# Altium PCB sensor.PcbDoc
Units mil, origin at the board's own origin, x right, y up, seen from the top; angles counter-clockwise.
Board outline 3160 x 3160 mil, 2 copper layers (Top Layer, Bottom Layer); 72 components, 30 nets, 168 pads, 13 vias.
Unrouted connection lines stored in the file: 11.
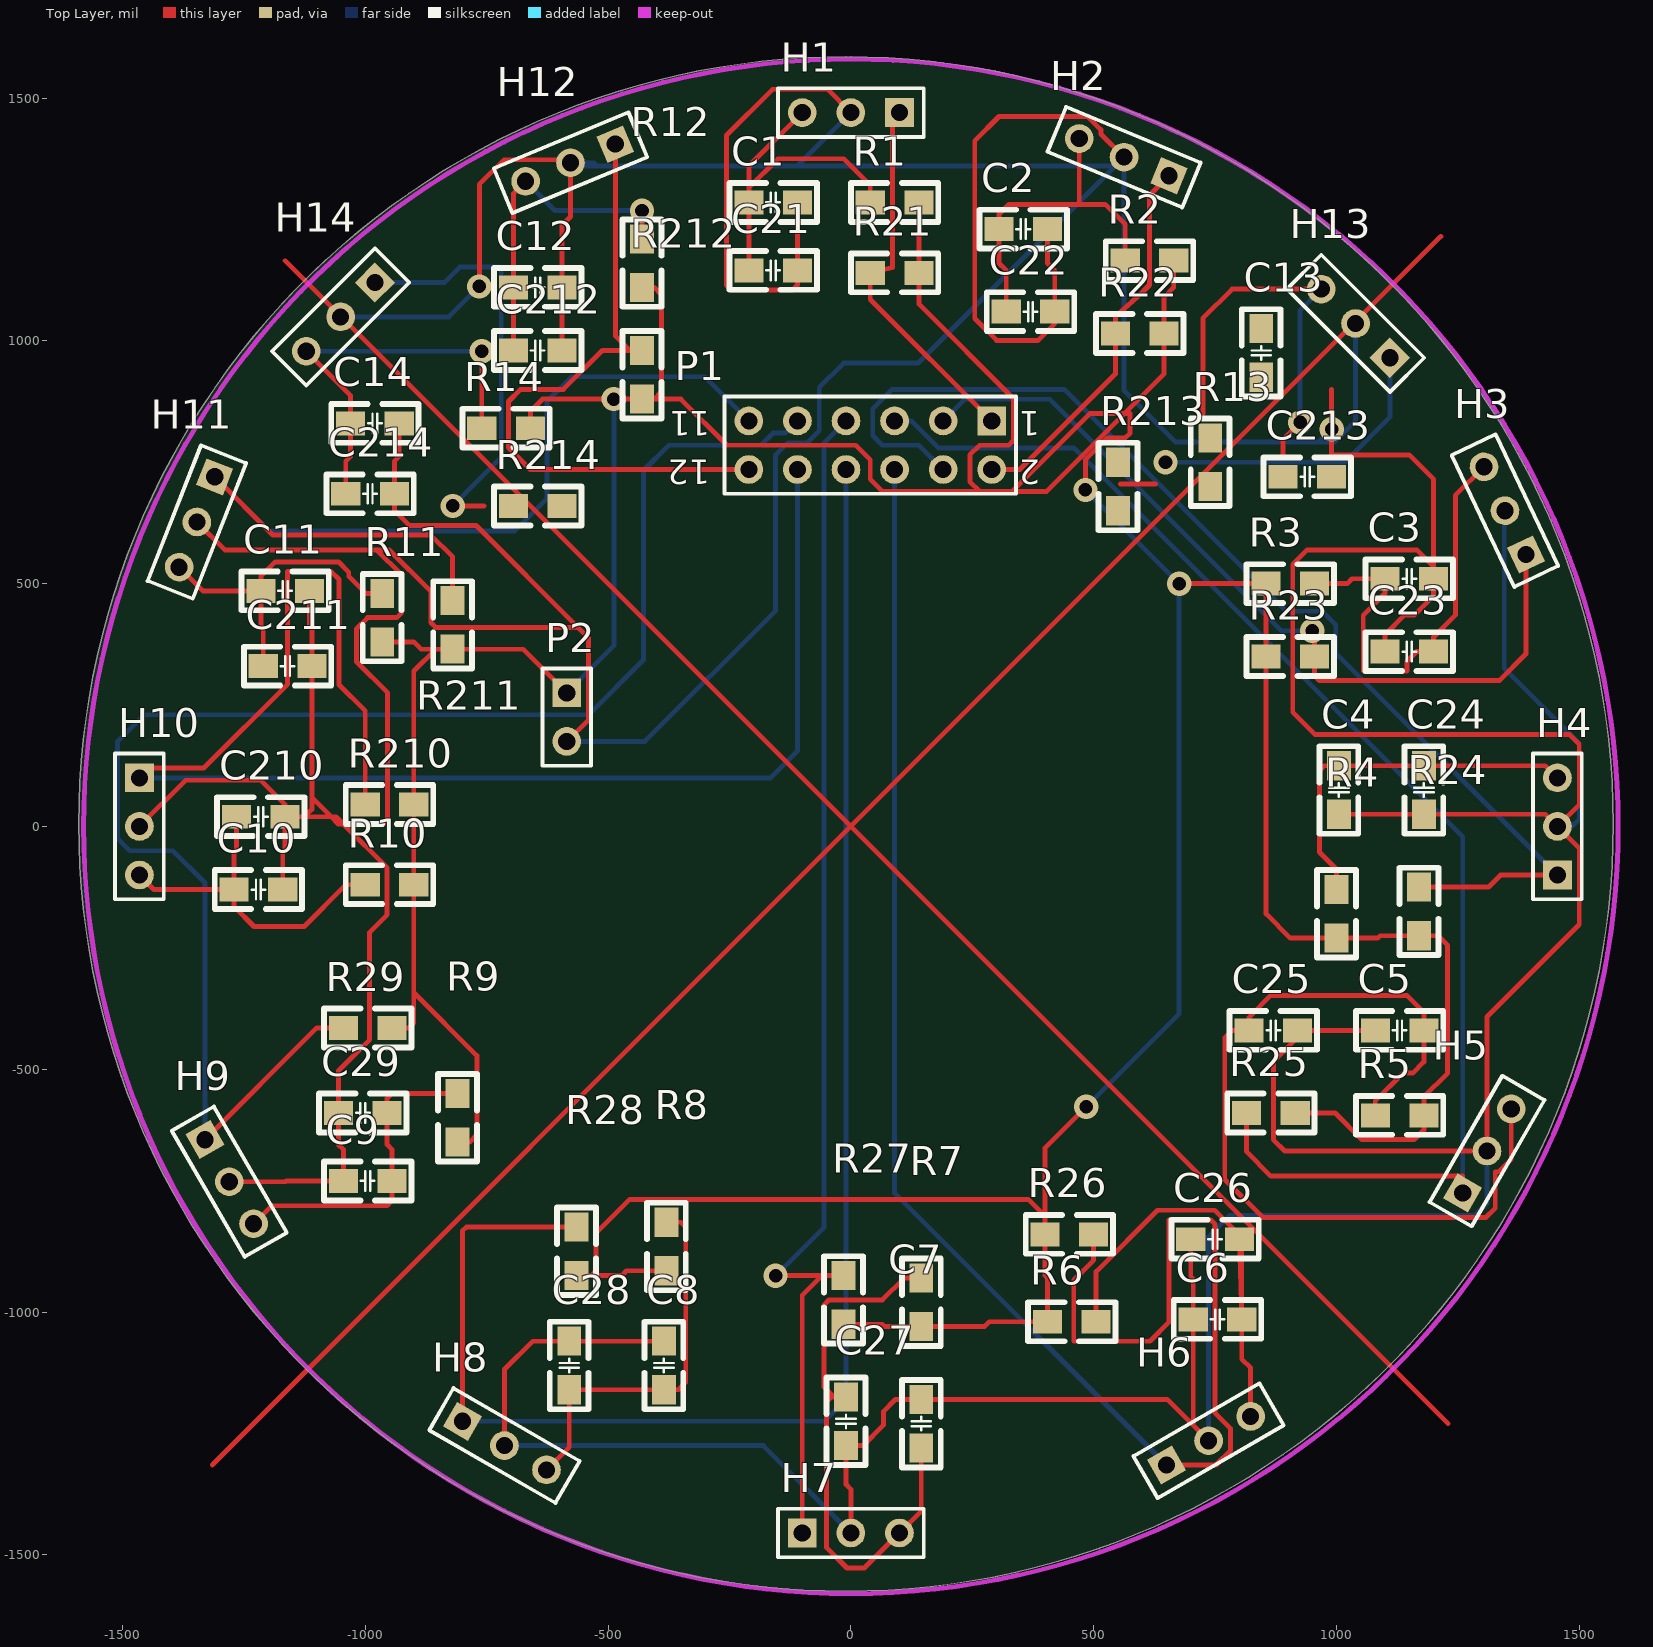
[diagram p0: Top Layer view]
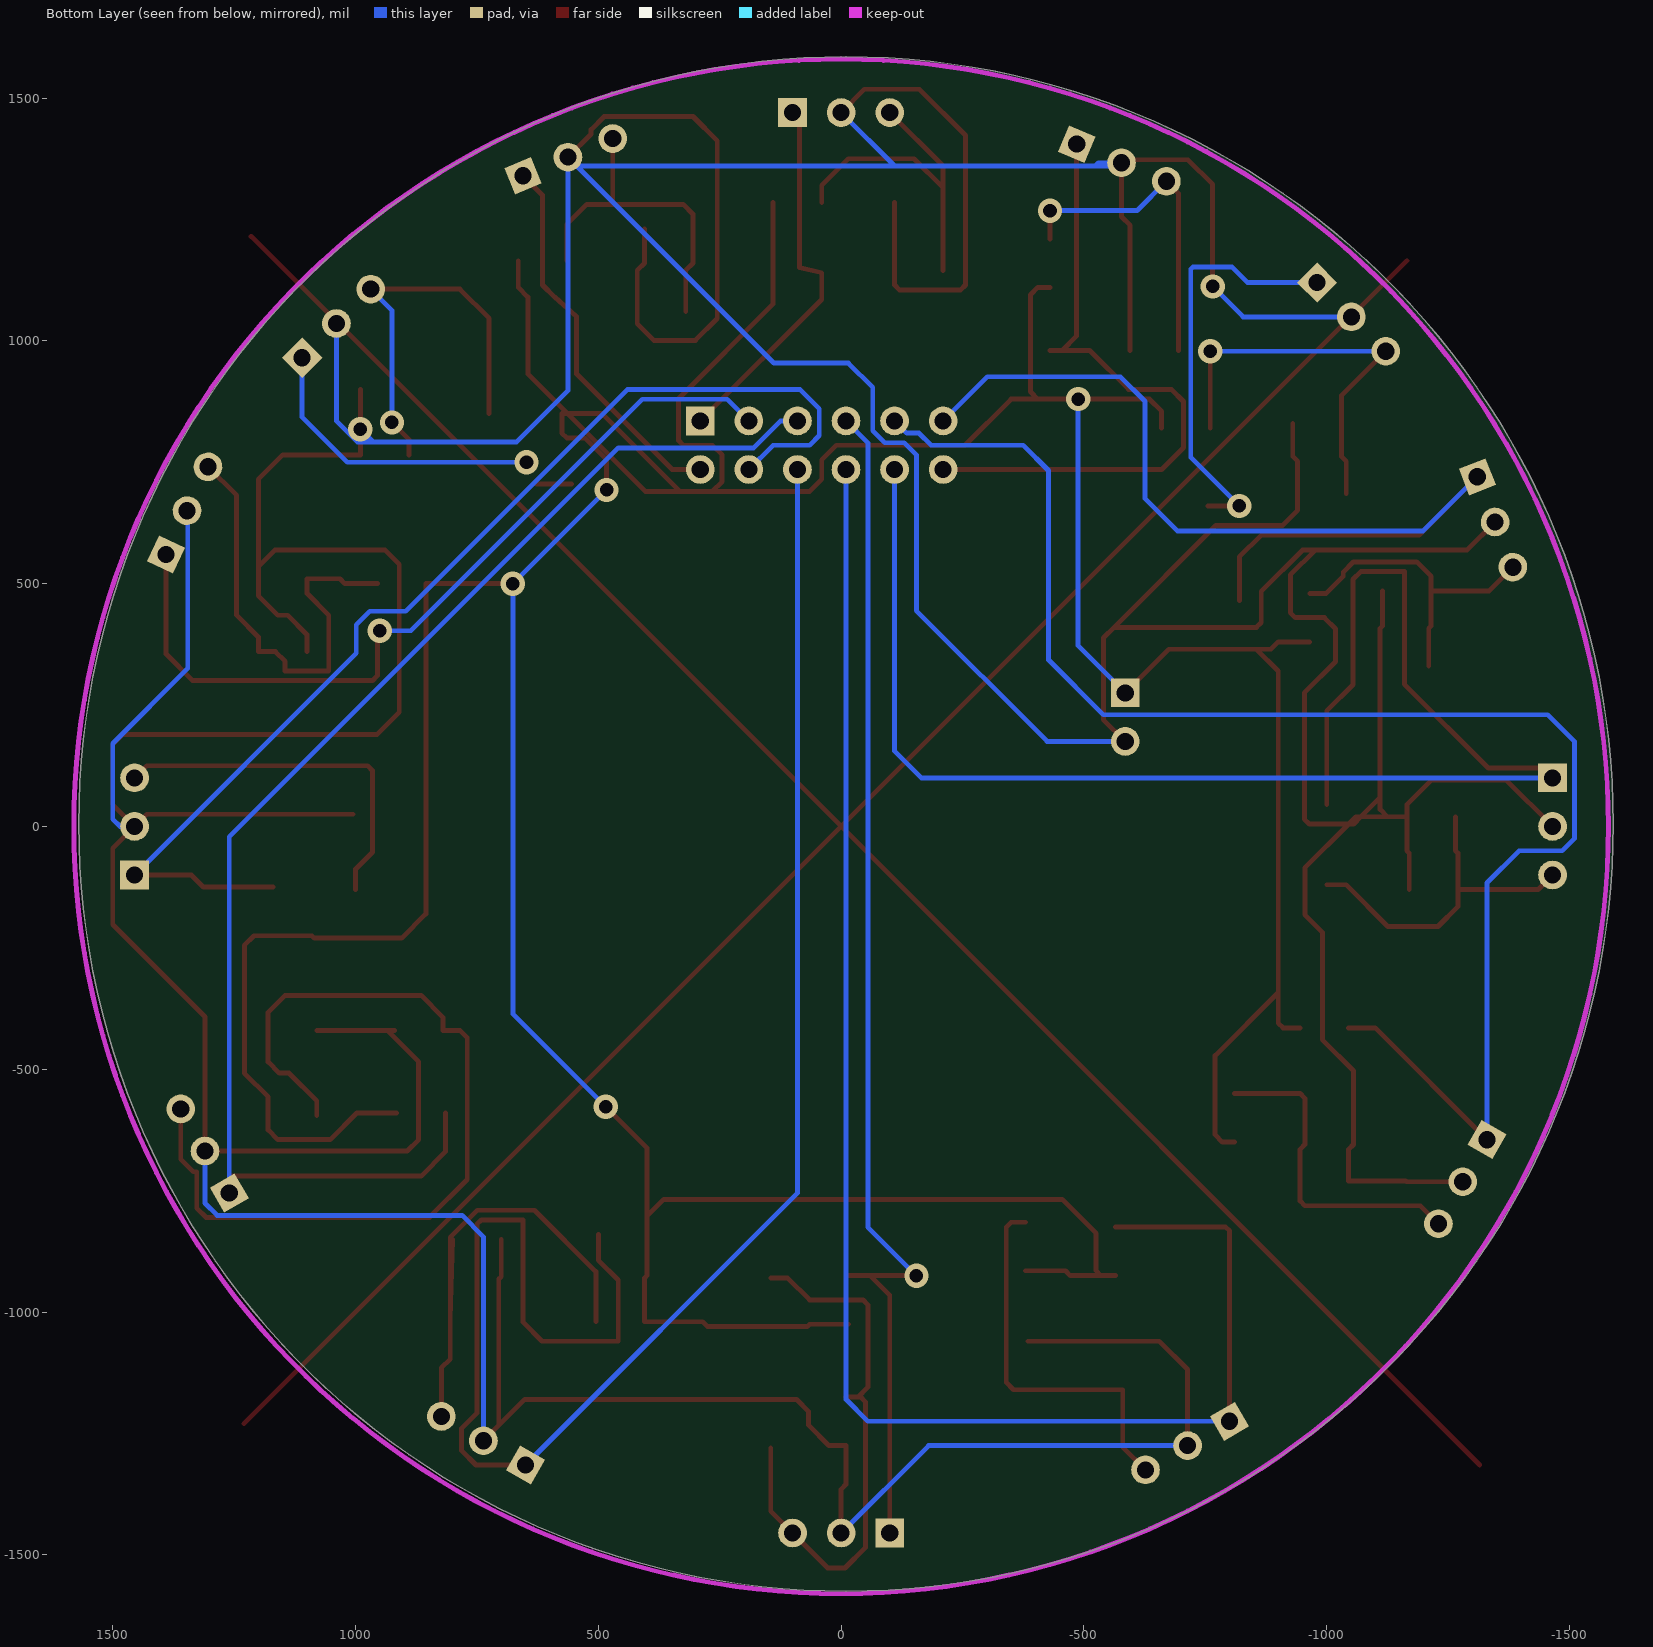
[diagram p1: Bottom Layer view, seen from below]

## Layer stack, top to bottom
Top Layer: signal copper 1.4
Dielectric: core 12.6, FR-4, Dk 4.8
Bottom Layer: signal copper 1.4

## Board outline
-1590,5 ccw(c-10,5) -10,-1575 ccw(c-10,5) 1570,5 ccw(c-10,5) -10,1585 ccw(c-10,5)

## Design rules (kind name [scope] priority, off if disabled: settings)
Clearance [All] p1: gap=10
PolygonConnect [All] p1: connectstyle=Relief reliefconductorwidth=10 reliefentries=4 polygonreliefangle="90 Angle" airgapwidth=10
RoomDefinition 2016 [InComponentClass('2016')] p1: confinementstyle=ConfineIn formatcopy=TRUE lockcomponents=FALSE outline 1395,505 16815,505 16815,1390 1395,1390
RoutingVias [All] p1: holewidth=28 width=50 viastyle="Through Hole" minholewidth=28 minwidth=50 maxholewidth=28 maxwidth=50
SolderMaskExpansion [All] p1: expansion=4
Width [All] p1: maxlimit=10 minlimit=10 preferedwidth=10
28 further rules are at their usual default settings.

## Components (designator, comment, footprint, x,y, rotation, side; value= is the part's Value field where it differs from the comment)
C1 "Cap" 0805C -110,1285 r0 top
C2 "Cap" 0805C 405,1230 r0 top
C3 "Cap" 0805C 1200,510 r0 top
C4 "Cap" 0805C 1005,25 r270 top
C5 "Cap" 0805C 1080,-420 r180 top
C6 "Cap" 0805C 705,-1015 r180 top
C7 "Cap" 0805C 145,-1180 r90 top
C8 "Cap" 0805C -385,-1060 r90 top
C9 "Cap" 0805C -1045,-730 r180 top
C10 "Cap" 0805C -1170,-130 r0 top
C11 "Cap" 0805C -1115,485 r0 top
C12 "Cap" 0805C -595,1110 r0 top
C13 "Cap" 0805C 845,1025 r90 top
C14 "Cap" 0805C -930,830 r0 top
C21 "Cap Pol3" 0805C -210,1145 r180 top
C22 "Cap Pol3" 0805C 320,1060 r180 top
C23 "Cap Pol3" 0805C 1200,360 r0 top
C24 "Cap Pol3" 0805C 1180,125 r90 top
C25 "Cap Pol3" 0805C 820,-420 r180 top
C26 "Cap Pol3" 0805C 800,-850 r0 top
C27 "Cap Pol3" 0805C -10,-1175 r90 top
C28 "Cap Pol3" 0805C -580,-1160 r270 top
C29 "Cap Pol3" 0805C -955,-590 r0 top
C210 "Cap Pol3" 0805C -1265,20 r180 top
C211 "Cap Pol3" 0805C -1210,330 r180 top
C212 "Cap Pol3" 0805C -695,980 r180 top
C213 "Cap Pol3" 0805C 890,720 r180 top
C214 "Cap Pol3" 0805C -1040,685 r180 top
H1 "Header 3" HDR1X3 100,1470 r180 top
H2 "Header 3" HDR1X3 655,1340 r157.5 top
H3 "Header 3" HDR1X3 1390,560 r115.5 top
H4 "Header 3" HDR1X3 1455,-100 r90 top
H5 "Header 3" HDR1X3 1260,-755 r60 top
H6 "Header 3" HDR1X3 650,-1315 r30 top
H7 "Header 3" HDR1X3 -100,-1455 r0 top
H8 "Header 3" HDR1X3 -800,-1225 r330 top
H9 "Header 3" HDR1X3 -1330,-645 r300 top
H10 "Header 3" HDR1X3 -1465,100 r270 top
H11 "Header 3" HDR1X3 -1310,720 r248.5 top
H12 "Header 3" HDR1X3 -485,1405 r202.5 top
H13 "Header 3" HDR1X3 1110,965 r135 top
H14 "Header 3" HDR1X3 -980,1120 r225 top
P1 "Header 6X2" HDR2X6 290,835 r180 top
P2 "Header 2" HDR1X2 -585,275 r270 top
R1 "Res1" 0805R 40,1285 r180 top
R2 "Res1" 0805R 565,1165 r180 top
R3 "Res1" 0805R 955,500 r0 top
R4 "Res1" 0805R 1000,-130 r90 top
R5 "Res1" 0805R 1080,-595 r180 top
R6 "Res1" 0805R 505,-1020 r0 top
R7 "Res1" 0805R 145,-930 r90 top
R8 "Res1" 0805R -380,-815 r90 top
R9 "Res1" 0805R -810,-550 r90 top
R10 "Res1" 0805R -1000,-120 r180 top
R11 "Res1" 0805R -965,480 r90 top
R12 "Res1" 0805R -430,1210 r90 top
R13 "Res1" 0805R 740,700 r270 top
R14 "Res1" 0805R -760,820 r180 top
R21 "Res1" 0805R 40,1140 r180 top
R22 "Res1" 0805R 545,1015 r180 top
R23 "Res1" 0805R 955,350 r0 top
R24 "Res1" 0805R 1170,-125 r90 top
R25 "Res1" 0805R 815,-590 r180 top
R26 "Res1" 0805R 500,-840 r0 top
R27 "Res1" 0805R -15,-925 r90 top
R28 "Res1" 0805R -565,-825 r90 top
R29 "Res1" 0805R -1045,-415 r180 top
R210 "Res1" 0805R -1000,45 r180 top
R211 "Res1" 0805R -820,465 r90 top
R212 "Res1" 0805R -430,980 r90 top
R213 "Res1" 0805R 550,650 r270 top
R214 "Res1" 0805R -695,660 r180 top

## Footprints (in the part's own frame and the unit in brackets; to place one, negate y for a bottom-side part, rotate by r counter-clockwise, add the part's x,y. Pads: shape width x height; smd on the part's side, far side on the other; paste and mask are expansions set on the pad)
0805C [mil]
  rect 60x49.21 smd: 1(0,0) 2(-100,0)
  silkscreen extent -140,-40 40,40, body extent -95,-25 -15,24, height 36
0805R [mil]
  rect 60x49.21 smd: 1(0,0) 2(-100,0)
  silkscreen extent -140,-40 40,40
HDR1X2 [mm] "Connector; Header; 2 Position"
  rect 1.5x1.5 hole 0.9: 1(0,0)
  round 1.5 hole 0.9: 2(2.54,0)
  silkscreen extent -1.27,-1.27 3.81,1.27
HDR1X3 [mm] "Connector; Header; 3 Position"
  rect 1.5x1.5 hole 0.9: 1(0,0)
  round 1.5 hole 0.9: 2(2.54,0) 3(5.08,0)
  silkscreen extent -1.27,-1.27 6.35,1.27
HDR2X6 [mm] "Connector; Header; 6x2 Position"
  rect 1.5x1.5 hole 0.9: 1(0,0)
  round 1.5 hole 0.9: 2(0,2.54) 3(2.54,0) 4(2.54,2.54) 5(5.08,0) 6(5.08,2.54) 7(7.62,0) 8(7.62,2.54) 9(10.16,0) 10(10.16,2.54) 11(12.7,0) 12(12.7,2.54)
  silkscreen extent -1.27,-1.27 13.97,3.81

## Part data
C1 C2 C3 C4 C5 C6 C7 C8 C9 C10 C11 C12 C13 C14: "Capacitor"
C21 C22 C23 C24 C25 C26 C27 C28 C29 C210 C211 C212 C213 C214: "Polarized Capacitor (Surface Mount)"
H1 H2 H3 H4 H5 H6 H7 H8 H9 H10 H11 H12 H13 H14: "Header, 3-Pin"
P1: "Header, 6-Pin, Dual row"
P2: "Header, 2-Pin"
R1 R2 R3 R4 R5 R6 R7 R8 R9 R10 R11 R12 R13 R14 R21 R22 R23 R24 R25 R26 R27 R28 R29 R210 R211 R212 R213 R214: "Resistor"

## Via types
v1: diameter 50, hole 28, Top Layer to Bottom Layer, 13 vias

## Nets (pads, with @x,y where several pads share a name; then routed paths per layer and width w, separated by ;. In a path a pad name is that pad's centre, name@x,y a point inside that pad or via, vN(x,y) a via of type N, cw(c..) or ccw(c..) an arc to the next point about the centre after c; other vN are vias at no path point)
+5: P2.1 R1.2 R2.2 R3.2 R4.2 R5.2 R6.2 R7.2 R8.2 R9.2 R10.2 R11.2 R12.2 R13.2 R14.2 R21.2 R22.2 R23.2 R24.2 R25.2 R26.2 R27.2 R28.2 R29.2 R210.2 R211.2 R212.2 R213.2 R214.2 | length 11196.7
  Top Layer w10: R11.2 -900,380 -885,365 -855,365 ; R29.2 -910,-415 -900,-405 -900,-342 ; R9.2 -785,-650 -770,-635 -770,-472 -900,-342 ; R14.2 -660,855 -635,880 v1(-488,880) R212.2 -405,880 ; P2.1 -675,365 R211.2 -855,365 ; R28.2 -535,-925 ; R12.2 -405,1110 -390,1095 -390,895 -405,880 ; R8.2 -462,-915 -472,-925 -535,-925 ; R27.2 65,-1025 70,-1030 R7.2 275,-1030 285,-1020 R6.2 405,-930 400,-925 R26.2 400,-803 ; R1.2 R21.2 140,1076 335,881 335,795 325,785 265,785 245,765 245,710 265,690 ; v1(483,693) 483,755 528,800 565,800 575,810 575,850 ; v1(485,-577) 400,-662 400,-803 ; R2.2 665,1110 645,1090 R22.2 645,932 569,856 ; v1(676,500) R3.2 R23.2 855,-180 905,-230 R4.2 1085,-230 1090,-225 R24.2 1209,-225 1229,-245 1229,-508 1180,-557 R5.2 1180,-625 1160,-645 1052,-645 997,-590 R25.2 ; -900,-342 R10.2 R210.2 -900,320 -855,365 ; -535,-925 -525,-915 -525,-838 -455,-768 365,-768 400,-803 ; -405,880 -350,880 -255,785 10,785 40,755 40,715 65,690 265,690 ; 265,690 332,690 ; 332,690 403,690 563,850 ; 332,690 492,850 563,850 ; 563,850 569,856 ; 563,850 575,850 ; 569,856 575,850
  Bottom Layer w10: P2.1 -488,372 v1(-488,880) ; v1(483,693) v1(676,500) 676,-386 v1(485,-577)
GND: C1.1 C2.1 C3.1 C4.1 C5.1 C6.1 C7.1 C8.1 C9.1 C10.1 C11.1 C12.1 C13.1 C14.1 C21.2 C22.2 C23.2 C24.2 C25.2 C26.2 C27.2 C28.2 C29.2 C210.2 C211.2 C212.2 C213.2 C214.2 H1.2 H2.2 H3.2 H4.2 H5.2 H6.2 H7.2 H8.2 H9.2 H10.2 H11.2 H12.2 H13.2 H14.2 P2.2 | length 21444.5
  Top Layer w10: H10.2 -1370,95 -1215,95 -1165,45 C210.2 ; H11.2 -1288.69,569 -976,569 ; H9.2 -1164,-731.6 -1162.4,-730 C9.1 -1045,-665 -1055,-655 C29.2 -1055,-503 -991,-439 -991,-218 -955,-182 -955,-85 -1045,5 ; C10.1 -1170,-55 -1165,-50 C210.2 ; C11.1 -1115,413 -1110,408 C211.2 -1110,60 ; C14.1 -930,762 -940,752 C214.2 -940,651 -909,620 -772,620 -562,410 ; v1(-765,1112) -765,1322 -714,1373 -583.66,1373 H12.2 -577.39,1255.61 -595,1238 C12.1 C212.2 ; H8.2 -713.4,-1118.4 -655,-1060 C28.2 C8.1 ; P2.2 -540,220 -540,388 -562,410 ; C1.1 C21.2 -110,1115 -120,1105 -246,1105 -256,1115 -256,1423 -161,1518 -48,1518 H1.2 ; H7.2 0,-1365 -10,-1355 C27.2 25,-1275 67,-1233 67,-1205 92,-1180 C7.1 651.6,-1180 705,-1233.4 ; C2.1 405,1160 420,1145 C22.2 420,1035 386,1001 300,1001 255,1046 255,1412 305,1462 488,1462 515,1435 515,1425.88 H2.2 ; C26.2 700,-927 705,-932 C6.1 705,-1233.4 ; H6.2 705,-1233.4 ; C25.2 C25.2@935,-420 ; 990,900 v1(990,818) 990,765 1150,765 1200,715 1200,535 ; C4.1 C24.2 1430,25 H4.2 ; C5.1 1000,-420 C25.2@935,-420 ; C23.2 1100,395 1140,435 1160,435 1200,475 C3.1 1200,535 ; C210.2 -1125,20 ; -1125,20 -1070,20 ; -1125,20 -1110,35 -1110,60 ; -1110,60 -1070,20 ; -1070,20 -1055,5 -1045,5 ; -1070,20 -1060,20 -1045,5 ; -1045,5 -964,5 -954,15 -954,275 -1018,339 -1018,407 -995,430 -935,430 -925,440 -925,518 -976,569 ; -976,569 -950,569 -865,484 -865,420 -855,410 -562,410 ; C25.2@935,-420 870,-485 870,-645 893.4,-668.4 H5.2 1310,-392 1500,-202 1500,-45 H4.2 ; 1200,535 1166,569 939,569 910,540 910,235 956,189 1480,189 1500,169 1500,45 H4.2
  Bottom Layer w10: H14.2 -827.71,1049.29 v1(-765,1112) ; H8.2 -180,-1275 H7.2 ; P2.2 -424,175 -155,444 -155,765 -130,790 -90,790 -65,815 -65,904 -15,954 138.34,954 H2.2@544.34,1360 ; H1.2 -110,1360 ; H6.2 736.6,-845 780.6,-801 1285,-801 1310,-776 H5.2 ; v1(990,818) 964,792 ; H13.2 1039.29,835 996.29,792 964,792 ; H3.2 1345.46,648.77 1345.46,325.33 1500,170.79 1500,15 1485,0 H4.2 ; -523,1360 -570.66,1360 H12.2 -529.73,1366.73 -523,1360 ; -523,1360 -110,1360 ; -110,1360 H2.2@544.34,1360 ; H2.2@544.34,1360 H2.2 562.61,897.39 668,792 964,792
NetC1_2: C1.2 C21.1 H1.3 R1.1 | length 703.2
  Top Layer w10: C21.1 C1.2 -210,1315 ; H1.3 -210,1360 -210,1315 ; R1.1 40,1320 -15,1375 -150,1375 -210,1315
NetC2_2: C2.2 C22.1 H2.3 R2.1 | length 703
  Top Layer w10: C22.1 320,1145 305,1160 C2.2 305,1261 325,1281 470.22,1281 ; H2.3 470.22,1281 ; R2.1 565,1240 524,1281 470.22,1281
NetC3_2: C3.2 C23.1 H3.3 R3.1 | length 953.8
  Top Layer w10: R3.1 1022,500 1032,510 C3.2 1100,480 1055,435 1055,320.39 1145,320.39 1145,340 1165,360 C23.1 1200,390 1245,435 1245,681.62 H3.3
NetC4_2: C4.2 C24.1 H4.3 R4.1 | length 764
  Top Layer w10: R4.1 1000,-88 965,-53 965,115 975,125 C4.2 C24.1 1430,125 H4.3
NetC5_2: C5.2 C25.1 H5.3 R5.1 | length 1852.6
  Top Layer w10: R5.1 1080,-565 1137,-508 1157,-508 1180,-485 C5.2 1180,-383 1145,-348 865,-348 820,-393 C25.1 785,-420 770,-435 770,-727 848,-805 1308,-805 1327,-786 1327,-711 1334,-711 1360,-685 H5.3
NetC6_2: C6.2 C26.1 H6.3 R6.1 | length 1020.2
  Top Layer w10: R6.1 505,-916.83 631.44,-790.39 749.39,-790.39 805,-846 C6.2 ; C26.1 C6.2 ; H6.3 823.21,-1115 805,-1096.79 C6.2
NetC7_2: C7.2 C27.1 H7.3 R7.1 | length 1156.1
  Top Layer w10: C27.1 -35,-1175 ; C7.2 145,-1410 H7.3 28,-1527 -8,-1527 -50,-1485 -50,-1185 -40,-1175 -35,-1175 ; R7.1 110,-930 65,-975 -45,-975 -55,-985 -55,-1155 -35,-1175
NetC8_2: C8.2 C28.1 H8.3 R8.1 | length 794.7
  Top Layer w10: H8.3 -580,-1278.21 C28.1 C8.2 -355,-1160 -340,-1145 -340,-825 -350,-815 R8.1
NetC9_2: C9.2 C29.1 H9.3 R9.1 | length 668.8
  Top Layer w10: H9.3 -1192.79,-781 -955,-781 -945,-771 C9.2 -945,-665 -955,-655 C29.1 -955,-560 -945,-550 R9.1
NetC10_2: C10.2 C210.1 H10.3 R10.1 | length 717.1
  Top Layer w10: H10.3 -1435,-130 C10.2 ; C210.1 -1265,-50 -1270,-55 C10.2 ; R10.1 -1040,-120 -1126,-206 -1229,-206 -1270,-165 C10.2
NetC11_2: C11.2 C211.1 H11.3 R11.1 | length 669.7
  Top Layer w10: H11.3 -1334.38,485 C11.2 ; C211.1 -1210,408 -1215,413 C11.2 ; R11.1 -999,480 -1034,515 -1034,523.61 -1055,544.61 -1185.39,544.61 -1215,515 C11.2
NetC12_2: C12.2 C212.1 H12.3 R12.1 | length 681.7
  Top Layer w10: C212.1 C12.2 -695,1303.24 H12.3 ; R12.1 v1(-430,1268)
  Bottom Layer w10: H12.3 -609.31,1268 v1(-430,1268)
NetC13_2: C13.2 C213.1 H13.3 R13.1 | length 838.8
  Top Layer w10: 725,850 725,1046.42 785,1106.42 H13.3 ; 890,765 890,797 v1(925,832)
  Bottom Layer w10: v1(925,832) 925,1062.84 H13.3
NetC14_2: C14.2 C214.1 H14.3 R14.1 | length 855.6
  Top Layer w10: H14.3 -1030,887.16 C14.2 -1030,762 -1040,752 C214.1 ; R14.1 v1(-760,978.58)
  Bottom Layer w10: H14.3 v1(-760,978.58)
OUT1: H1.1 P1.1 R21.1 | length 788.9
  Top Layer w10: H1.1 86,1470 86,1151 R21.1 40,1085 P1.1
OUT2: H2.1 P1.2 R22.1 | length 791.7
  Top Layer w10: P1.2 348,735 545,932 R22.1 545,1050 590,1090 615,1115 615,1300 H2.1
OUT3: H3.1 P1.3 R23.1 | length 1737.3
  Top Layer w10: v1(950,403) 955,398 R23.1 955,310.39 965,300.39 1335.39,300.39 1390,355 H3.1
  Bottom Layer w10: P1.3 234.53,879.53 409.47,879.53 886,403 v1(950,403)
OUT4: H4.1 P1.4 R24.1 | length 2399
  Top Layer w10: R24.1 1313,-125 1338,-100 H4.1
  Bottom Layer w10: P1.4 140,785 65,785 45,805 45,860 84.53,899.53 440.47,899.53 897,443 970.46,443 998.46,415 998.46,356.54 H4.1
OUT5: H5.1 P1.5 R25.1 | length 2839
  Top Layer w10: R25.1 815,-670 865,-720 1260,-720 H5.1
  Bottom Layer w10: P1.5 124.53,835 180,779.53 459,779.53 1260,-21.47 H5.1
OUT6: H6.1 P1.6 R26.1 | length 3663.8
  Top Layer w10: R26.1 500,-893 459,-934 459,-1060 616,-1060 655,-1021 655,-810.39 741.11,-810.39 750,-819.29 750,-1208 782,-1240 782,-1285 752,-1315 H6.1
  Bottom Layer w10: P1.6 90,-755 H6.1
OUT7: H7.1 P1.7 R27.1 | length 2506.6
  Top Layer w10: v1(-155,-925) -60,-925 ; H7.1 -100,-965 -60,-925 ; R27.1 -60,-925
  Bottom Layer w10: v1(-155,-925) -55,-825 -55,790 P1.7
OUT8: H8.1 P1.8 R28.1 | length 3354
  Top Layer w10: H8.1 -800,-833 -792,-825 R28.1
  Bottom Layer w10: H8.1 -55,-1225 -10,-1180 P1.8
OUT9: H9.1 P1.9 R29.1 | length 3228.8
  Top Layer w10: H9.1 -1100,-415 R29.1
  Bottom Layer w10: H9.1 -1330,-116 -1396,-50 -1485,-50 -1510,-25 -1510,175 -1455,230 -540,230 -427,343 -427,733 -375,785 -185.27,785 -160.27,810 -135,810 P1.9
OUT10: H10.1 P1.10 R210.1 | length 3172.9
  Top Layer w10: H10.1 -1445,120 -1333,120 -1160,293 -1160,524.61 -1070,524.61 -1054,508.61 -1054,292 -1000,238 R210.1
  Bottom Layer w10: H10.1 -165,100 -110,155 P1.10
OUT11: H11.1 P1.11 R211.1 | length 2081.3
  Top Layer w10: H11.1 -1190,600 -865,600 -820,555 R211.1
  Bottom Layer w10: H11.1 -1198,608 -693,608 -626,675 -626,875 -575,926 -301,926 P1.11
OUT12: H12.1 P1.12 R212.1 | length 1364.6
  Top Layer w10: H12.1 -485,1010 -455,980 ; R212.1 -455,980 ; P1.12 -660,735 -705,780 -705,875 -680,900 -592,900 -512,980 -455,980
OUT13: H13.1 R213.1 | length 695.5
  Top Layer w10: 555,705 628,705
  Bottom Layer w10: v1(648,750) 1017,750 1110,843 H13.1
OUT14: H14.1 R214.1 | length 869.4
  Top Layer w10: v1(-820,660) -755,660
  Bottom Layer w10: H14.1 -836.97,1120 -804.67,1152.3 -724.67,1152.3 -720,1147.63 -720,760 v1(-820,660)
copper on no net: | length 6965
  Top Layer w10: -1315,-1315 0,0 ; -1165,1165 0,0 ; 1215,1215 0,0 ; 1230,-1230 0,0

## Keep-outs
Keep-Out Layer:
  circle w10: c0,0 r1580

## Text inside footprints (layer, text, board x,y; h text height)
P1: Top Overlay "2" at 390,755 h50 r180; Top Overlay "1" at 390,855 h50 r180; Top Overlay "1" at -290,855 h50 r180; Top Overlay "1" at -330,855 h50 r180; Top Overlay "12" at -290,755 h50 r180